# Altium PCB classyTKL_ALPS.PcbDoc (part 2 of 2)
Units mm, origin at the board's own origin, x right, y up, seen from the top; angles counter-clockwise.
Board outline 346.59 x 122.85 mm, 2 copper layers (Component Side, Bottom Layer), stack 1.571 mm thick; 201 components, 128 nets, 679 pads, 47 vias.
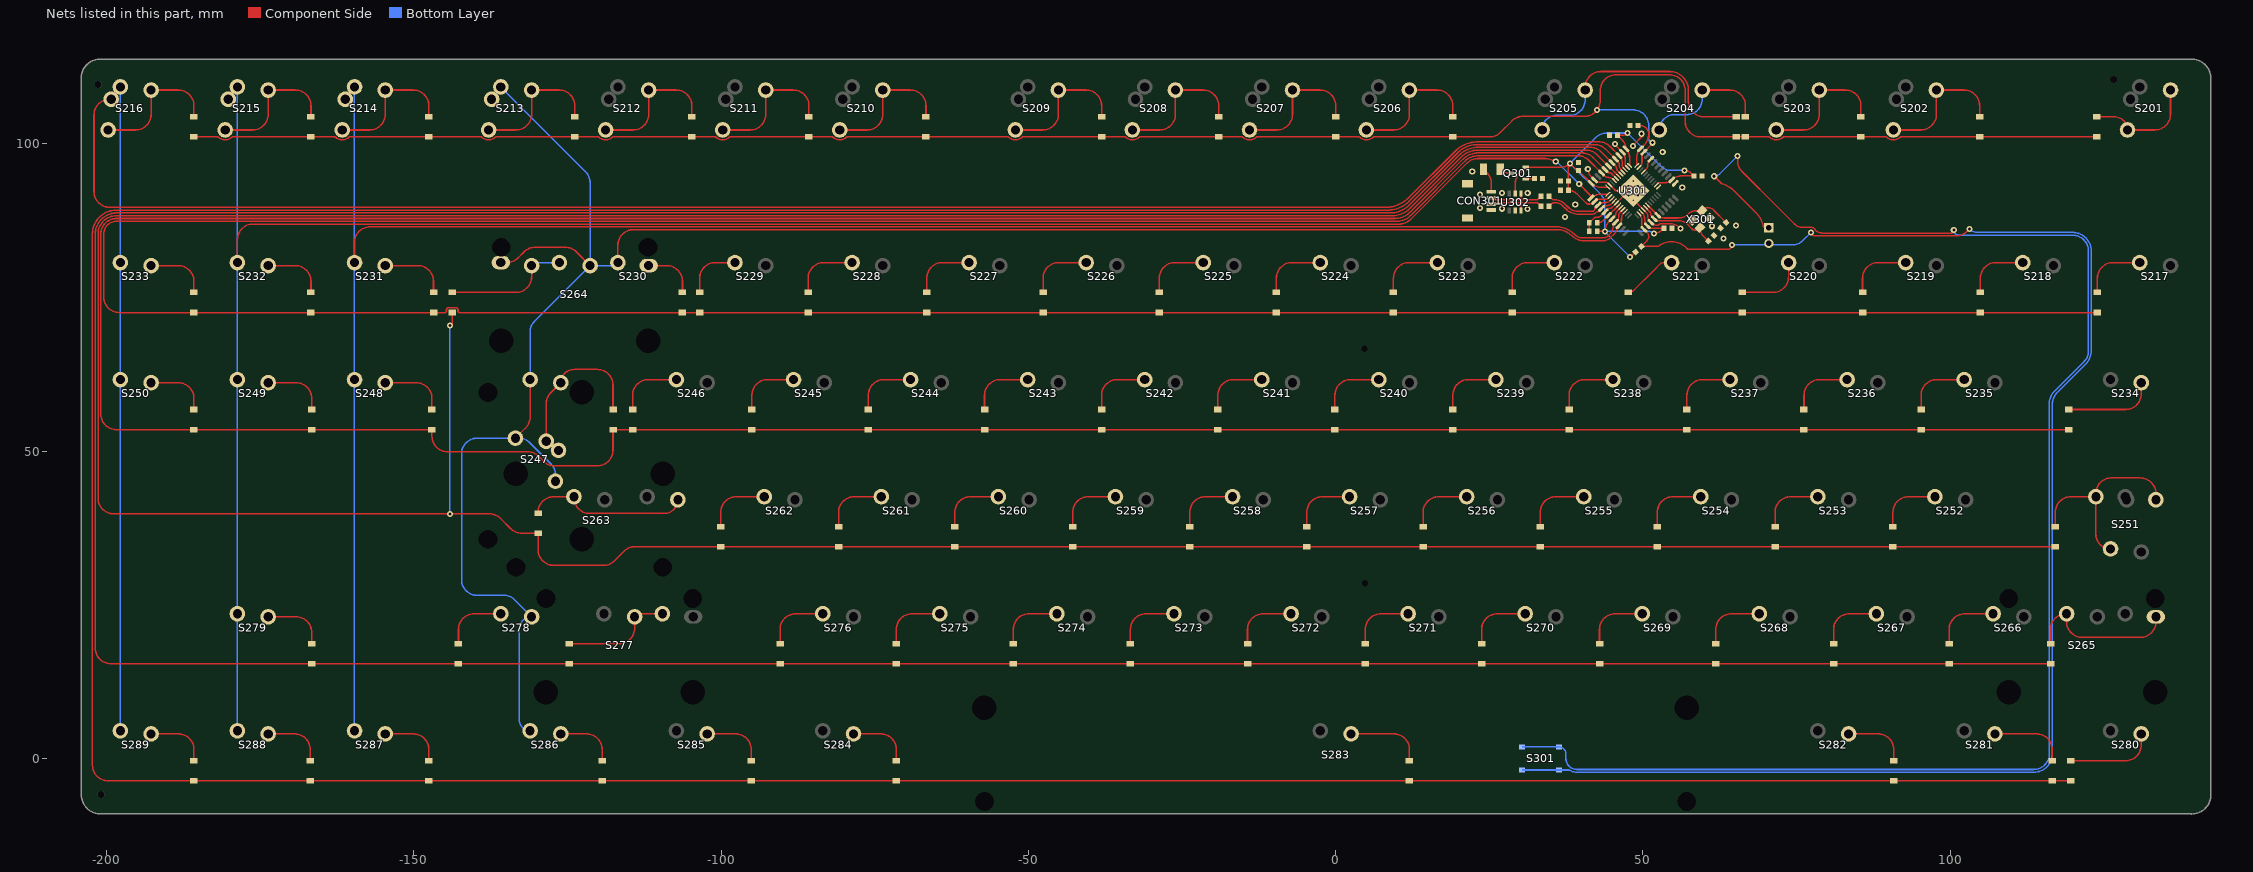
[diagram p2: the nets of this part, all layers, seen from the top]

## Via types
v1: diameter 1, hole 0.5, Component Side to Bottom Layer, tented both sides, 38 vias
v2: diameter 0.6, hole 0.3, Component Side to Bottom Layer, tented bottom, 9 vias

## Nets (pads, with @x,y where several pads share a name; then routed paths per layer and width w, separated by ;. In a path a pad name is that pad's centre, name@x,y a point inside that pad or via, vN(x,y) a via of type N, cw(c..) or ccw(c..) an arc to the next point about the centre after c; other vN are vias at no path point) (continued)
col14: S213.2 S230.2 S247.2 S264.2 S278.2 S286.2 U301.9 | length 338.6
  Component Side w0.254: S264.2@-135.851,80.7 -134.855,80.7 ccw(c-134.855,83.24) -133.059,81.444 -132.062,82.441 cw(c-130.266,80.645) -130.266,83.185 -125.363,83.185 cw(c-125.363,80.645) -123.567,82.441 S264.2@-121.326,80.2 ; S247.2@-133.469,52.125 -131.832,53.762 ccw(c-133.628,55.558) -131.088,55.558 S247.2@-131.088,61.65 ; S230.2@-116.801,80.7 -116.801,83.515 cw(c-114.261,83.515) -116.8,83.535 cw(c-114.261,83.515) -114.281,86.055 cw(c-114.261,83.515) -114.261,86.055 35.995,86.055 cw(c35.995,82.604) 38.435,85.044 ccw(c40.34,86.949) 40.34,84.255 43.54,84.255 ccw(c43.54,85.917) 44.546,84.594 45.393,85.441 ccw(c44.474,86.36) 45.773,86.36 U301.9@46.095,86.682 46.127,86.714 ccw(c45.211,87.63) 46.506,87.63 46.506,87.884 cw(c47.67,87.884) 46.847,88.707 U301.9@47.12,88.98
  Bottom Layer w0.254: S264.2@-135.891,81.28 S264.2@-134.803,80.193 ; S213.2@-135.891,109.275 S213.2@-135.891,109.855 ; S213.2@-135.851,109.275 -122.069,95.494 cw(c-123.866,93.698) -121.326,93.698 S264.2@-121.326,80.2 ; S286.2@-131.088,4.5 cw(c-131.088,6.255) -132.842,6.255 -132.842,21.058 cw(c-130.851,21.058) S278.2@-130.851,23.05 -133.699,25.898 ccw(c-135.255,24.342) -135.255,26.543 -139.7,26.543 cw(c-139.7,29.083) -142.24,29.083 -142.24,49.585 cw(c-139.7,49.585) -139.7,52.125 S247.2@-133.469,52.125 -132.933,52.125 cw(c-132.933,49.585) -131.137,51.381 -127.713,47.957 cw(c-129.509,46.161) -126.969,46.161 S247.2@-126.969,45.125 ; S247.2@-131.088,61.65 -131.088,69.385 cw(c-128.548,69.385) -130.344,71.181 S264.2@-121.326,80.2 ; S230.2@-116.801,80.7 cw(c-118.008,81.907) -118.008,80.2 S264.2@-121.326,80.2
col15: S214.2 S231.2 S248.2 S287.2 U301.8 | length 319.2
  Component Side w0.254: S231.2@-159.663,80.7 -159.663,83.969 cw(c-157.123,83.969) -157.123,86.509 35.995,86.509 cw(c35.995,82.604) 38.756,85.365 ccw(c40.34,86.949) 40.34,84.709 43.48,84.709 ccw(c43.48,86.01) 44.399,85.09 44.485,85.176 ccw(c42.731,86.93) 45.212,86.93 U301.8@45.529,87.247 45.703,87.421 ccw(c44.859,88.265) 46.052,88.265 cw(c46.908,88.265) 46.302,88.869 U301.8@46.767,89.333
  Bottom Layer w0.254: S287.2@-159.703,5.08 -159.703,61.65 -159.703,80.7 -159.703,109.275 S214.2@-159.703,109.854
col16: S215.2 S232.2 S249.2 S279.2 S288.2 U301.1 | length 339.9
  Component Side w0.254: S232.2@-178.713,80.7 -178.713,84.423 cw(c-176.173,84.423) -176.173,86.963 10.388,86.963 ccw(c10.388,89.503) 12.184,87.707 21.368,96.89 cw(c23.164,95.094) 23.164,97.634 34.09,97.634 cw(c34.09,95.094) v1@35.886,96.89 ; v1(39.624,93.472) 41.343,91.753 cw(c40.798,91.207) U301.1@41.569,91.207 cw(c43.02,89.756) 43.02,91.808 U301.1@44.292,91.808
  Bottom Layer w0.254: S215.2@-178.994,109.855 S215.2@-178.753,109.855 ; S288.2@-178.753,5.08 S232.2@-178.753,80.7 ; S232.2@-178.713,80.7 S215.2@-178.713,109.275 ; v1(35.814,97.155) cw(c35.814,96.848) 36.031,97.065 v1(39.624,93.472)
col17: S216.2 S233.2 S250.2 S289.2 U301.36 | length 378.5
  Component Side w0.254: S216.2@-199.263,107.275 -199.512,107.275 ccw(c-199.512,104.735) -202.052,104.735 -202.052,92.227 ccw(c-199.512,92.227) -199.512,89.687 8.132,89.687 ccw(c8.132,94.951) 11.854,91.229 19.441,98.816 cw(c23.164,95.094) 23.164,100.358 42.786,100.358 cw(c42.786,97.818) 44.582,99.614 U301.36@46.095,98.101 U301.36@46.223,97.973 ; U301.36@46.223,97.973 cw(c45.278,97.028) 46.614,97.028 46.614,96.774 ccw(c47.737,96.774) 46.943,95.98 U301.36@47.12,95.803
  Bottom Layer w0.254: S289.2@-197.803,5.08 -197.803,61.65 -197.803,80.7 -197.803,109.275 S216.2@-197.803,109.855
D_N: CON301.2 R305.2 U302.4 | length 9.3
  Component Side w0.254: CON301.2@25.344,91.24 ccw(c26.167,92.063) 26.167,90.899 30.226,90.899 ; U302.4@30.16,91.751 30.16,90.965 ccw(c30.226,90.965) 30.226,90.899 ; R305.2@33.392,91.496 32.905,91.009 cw(c32.639,91.275) 32.639,90.899 30.226,90.899
D_P: CON301.3 R306.2 U302.3 | length 9.5
  Component Side w0.254: CON301.3@25.344,90.24 cw(c25.831,89.753) 25.831,90.442 32.639,90.442 cw(c32.639,90.066) 32.905,90.332 R306.2@33.392,89.845 ; U302.3@30.16,89.351 30.16,90.367 cw(c30.226,90.367) 30.226,90.433
D_PRE_N: R305.1 U301.3 | length 12.1
  Component Side w0.254: R305.1@34.692,91.496 35.007,91.181 ccw(c35.687,91.861) 35.687,90.899 cw(c35.687,88.645) 37.281,90.239 37.749,89.771 ccw(c39.545,91.567) 39.545,89.027 41.704,89.027 ccw(c41.704,89.487) 42.029,89.162 42.134,89.266 cw(c42.719,89.266) 42.305,89.68 U301.3@42.701,90.076 cw(c43.542,89.235) 43.542,90.424 43.685,90.424 ccw(c43.685,91.96) 44.772,90.874 U301.3@44.999,91.101 ; 35.809,90.906 ccw(c35.953,92.503) 35.953,90.899
D_PRE_P: R306.1 U301.4 | length 12.2
  Component Side w0.254: R306.1@34.692,89.845 35.007,90.16 cw(c35.687,89.48) 35.687,90.442 cw(c35.687,88.645) 36.957,89.916 37.425,89.448 ccw(c39.545,91.567) 39.545,88.57 41.704,88.57 ccw(c41.704,89.487) 42.353,88.839 42.457,88.943 ccw(c42.457,89.528) 42.871,89.114 U301.4@43.266,89.51 43.479,89.722 cw(c44.069,89.132) 44.069,89.967 ccw(c44.069,91.18) 44.927,90.322 U301.4@45.352,90.747
GND: C301.1 C302.1 C303.1 C304.1 C305.1 C306.1 C307.1 C308.1 C309.1 C310.1 CON301.4 CON301.5 CON302.1 R302.2 R307.2 S301.1 U301.5 U301.15 U301.23 U301.35 U301.43 U302.2 X301.2 X301.4 | length 294.7
  Component Side w0.254: v1(41.026,95.941) ccw(c42.694,95.941) 41.514,94.762 U301.43@42.135,94.142 ccw(c43.003,95.01) 43.003,93.782 43.815,93.782 cw(c43.815,92.872) 44.458,93.516 U301.43@44.645,93.328 45.582,92.392 v2(46.855,92.392) U301.43@47.704,92.392 ; C302.1@41.265,85.781 C301.1@41.265,87.178 41.968,87.881 cw(c42.418,87.431) 42.418,88.067 ccw(c42.418,89.363) 43.334,88.447 U301.5@43.832,88.944 44.314,89.426 cw(c44.577,89.163) 44.577,89.535 ccw(c44.577,90.187) 45.038,89.726 U301.5@45.706,90.394 U301.43@47.704,92.392 ; v1(45.471,100.005) 45.471,99.856 U301.35@46.661,98.667 cw(c45.618,97.624) 47.092,97.624 47.092,96.774 ccw(c47.662,96.774) 47.259,96.371 U301.35@47.474,96.157 ; v1(48.387,99.695) 48.387,99.746 v1@50.043,101.402 ; U301.15@51.091,87.449 cw(c51.781,88.138) 50.805,88.138 ccw(c49.733,88.138) 50.491,88.897 U301.15@50.055,89.333 48.411,90.977 v2(48.411,92.392) U301.43@47.704,92.392 ; U301.15@51.091,87.448 U301.15@51.292,87.247 51.476,87.063 ccw(c52.249,87.836) 51.63,86.935 ccw(c52.249,87.836) 52.249,86.743 ccw(c52.198,87.405) 52.667,86.935 cw(c52.922,86.681) 52.922,87.041 54.274,87.041 cw(c54.274,84.501) 56.07,86.297 v1(56.134,86.233) ; C303.1@54.745,86.289 C303.1@54.745,86.415 ; v1@56.312,92.975 v1(56.393,92.893) ; v1(61.595,94.742) 62.744,93.593 ccw(c62.924,93.773) 62.851,93.529 cw(c61.482,88.918) 64.885,92.318 68.404,88.799 cw(c65.378,85.771) 69.562,86.676 ccw(c69.81,86.729) 69.724,86.49 ccw(c70.485,88.646) CON302.1@70.485,86.36 ; v1(65.405,98.044) 65.405,97.281 ccw(c67.945,97.281) 66.148,95.486 ccw(c67.945,97.281) 66.149,95.485 71.99,89.643 74.657,86.976 ccw(c76.008,88.327) 74.659,86.975 ccw(c76.008,88.327) 76.008,86.417 77.226,86.417 cw(c77.343,85.598) 78.083,85.968 ccw(c79.205,87.09) 78.97,85.521 ccw(c79.205,87.09) 79.205,85.503 97.536,85.503 100.297,85.503 ccw(c100.297,85.757) 100.54,85.682 ccw(c99.568,85.979) v1(100.584,85.979)
  Bottom Layer w0.254: S301.1@30.338,1.875 S301.1@36.337,1.875 cw(c36.337,0.747) 37.465,0.747 37.465,0 ccw(c39.261,0) 39.261,-1.796 113.597,-1.796 ccw(c113.597,0.744) 116.137,0.744 116.137,57.866 cw(c118.677,57.866) 116.881,59.662 121.744,64.524 ccw(c119.947,66.32) 122.487,66.32 122.487,82.606 ccw(c119.947,82.606) 122.192,83.795 ccw(c119.947,82.606) 121.136,84.851 ccw(c119.947,82.606) 119.947,85.146 101.417,85.146 cw(c101.417,85.979) v1(100.584,85.979) ; v1(61.595,94.742) ccw(c61.595,95.968) 62.462,95.101 v1(65.405,98.044)
  other v1: 63.124,84.638 61.214,86.614 65.151,86.741 37.338,88.138 31.242,89.408 27.056,89.464 23.5,89.591 38.989,90.17 23.5,91.75 27.056,92.004 31.247,92.004 22.225,95.504 53.213,98.679 49.789,101.656
  other v2: 48.411,90.836 47.633,91.614 49.188,91.614 49.966,92.392 47.633,93.169 49.188,93.169 48.411,93.947
NetC301_2: C301.2 U301.6 | length 4.6
  Component Side w0.254: C301.2@42.565,87.178 ccw(c42.565,88.703) 43.643,87.624 ; 43.644,87.625 U301.6@44.398,88.379 44.398,88.39 46.048,90.04 U301.6@46.06,90.04
NetC307_2: C307.2 U301.17 X301.3 | length 15
  Component Side w0.254: U301.17@50.762,90.04 U301.17@52.423,88.379 ccw(c53.461,89.416) 53.461,87.949 55.721,87.949 ccw(c55.721,90.329) 57.404,88.646 cw(c58.587,87.463) 58.587,89.136 X301.3@59.613,89.136 59.918,89.441 cw(c60.452,88.906) 60.452,89.662 cw(c60.452,88.141) 61.527,89.217 C307.2@63.536,87.208
NetC308_2: C308.2 U301.16 X301.1 | length 13.4
  Component Side w0.254: U301.16@50.408,89.687 51.109,88.986 cw(c50.747,88.623) 51.259,88.623 ccw(c51.772,88.623) 51.409,88.262 U301.16@51.858,87.813 ; U301.16@51.858,87.813 ccw(c52.626,88.581) 52.626,87.495 55.943,87.495 cw(c55.943,85.788) 57.15,86.995 57.986,86.159 ccw(c58.42,86.592) 58.42,85.979 ccw(c58.42,87.041) 59.171,86.29 X301.1@59.259,86.378 ccw(c61.254,86.378) 59.843,84.968 C308.2@60.633,84.178 C308.2@60.633,84.316
NetD201_1: D201.1 S201.1 | length 18.5
  Component Side w0.254: D201.1@123.83,104.41 126.714,104.41 cw(c126.714,102.275) S201.1@128.849,102.275 ; S201.1@129.032,102.275 133.309,102.275 ccw(c133.309,104.815) 135.849,104.815 S201.1@135.849,108.775
NetD202_1: D202.1 S202.1 | length 22.7
  Component Side w0.254: S202.1@90.749,102.275 95.209,102.275 ccw(c95.209,104.815) 97.749,104.815 S202.1@97.749,108.775 102.24,108.775 cw(c102.24,106.235) 104.78,106.235 D202.1@104.78,104.41
NetD203_1: D203.1 S203.1 | length 22.5
  Component Side w0.254: S203.1@71.699,102.275 76.159,102.275 ccw(c76.159,104.815) 78.699,104.815 S203.1@78.699,108.775 82.936,108.775 cw(c82.936,106.235) 85.476,106.235 D203.1@85.476,104.41
NetD204_1: D204.1 S204.1 | length 21.6
  Component Side w0.254: S204.1@59.649,108.775 64.14,108.775 cw(c64.14,106.235) 66.68,106.235 D204.1@66.68,104.41
  Bottom Layer w0.254: S204.1@52.649,102.275 cw(c55.149,102.275) 55.149,104.775 57.109,104.775 ccw(c57.109,107.315) 59.649,107.315 S204.1@59.649,108.775
NetD205_1: D205.1 S205.1 | length 42.8
  Component Side w0.254: S205.1@40.599,108.775 40.599,109.248 cw(c43.139,109.248) 43.139,111.788 54.328,111.788 cw(c54.328,108.712) 57.404,108.712 57.404,106.95 ccw(c59.944,106.95) 59.944,104.41 D205.1@65.151,104.41
  Bottom Layer w0.254: S205.1@33.599,102.275 33.599,102.306 cw(c35.941,102.306) 35.941,104.648 38.059,104.648 ccw(c38.059,107.188) 40.599,107.188 S205.1@40.599,108.775
NetD206_1: D206.1 S206.1 | length 22.7
  Component Side w0.254: S206.1@4.994,102.275 9.454,102.275 ccw(c9.454,104.815) 11.994,104.815 S206.1@11.994,108.775 16.515,108.775 cw(c16.515,106.235) 19.055,106.235 D206.1@19.055,104.41
NetD207_1: D207.1 S207.1 | length 22.7
  Component Side w0.254: S207.1@-14.026,102.275 -9.566,102.275 ccw(c-9.566,104.815) -7.026,104.815 S207.1@-7.026,108.775 -2.535,108.775 cw(c-2.535,106.235) 0.005,106.235 D207.1@0.005,104.41
NetD208_1: D208.1 S208.1 | length 22.7
  Component Side w0.254: S208.1@-33.076,102.275 -28.616,102.275 ccw(c-28.616,104.815) -26.076,104.815 S208.1@-26.076,108.775 -21.585,108.775 cw(c-21.585,106.235) -19.045,106.235 D208.1@-19.045,104.41
NetD209_1: D209.1 S209.1 | length 22.7
  Component Side w0.254: S209.1@-52.126,102.275 -47.666,102.275 ccw(c-47.666,104.815) -45.126,104.815 S209.1@-45.126,108.775 -40.635,108.775 cw(c-40.635,106.235) -38.095,106.235 D209.1@-38.095,104.41
NetD210_1: D210.1 S210.1 | length 22.7
  Component Side w0.254: S210.1@-80.701,102.275 -76.241,102.275 ccw(c-76.241,104.815) -73.701,104.815 S210.1@-73.701,108.775 -69.21,108.775 cw(c-69.21,106.235) -66.67,106.235 D210.1@-66.67,104.41
NetD211_1: D211.1 S211.1 | length 22.7
  Component Side w0.254: S211.1@-99.751,102.275 -95.291,102.275 ccw(c-95.291,104.815) -92.751,104.815 S211.1@-92.751,108.775 -88.26,108.775 cw(c-88.26,106.235) -85.72,106.235 D211.1@-85.72,104.41
NetD212_1: D212.1 S212.1 | length 22.7
  Component Side w0.254: S212.1@-118.801,102.275 -114.341,102.275 ccw(c-114.341,104.815) -111.801,104.815 S212.1@-111.801,108.775 -107.31,108.775 cw(c-107.31,106.235) -104.77,106.235 D212.1@-104.77,104.41
NetD213_1: D213.1 S213.1 | length 22.7
  Component Side w0.254: S213.1@-137.851,102.275 -133.391,102.275 ccw(c-133.391,104.815) -130.851,104.815 S213.1@-130.851,108.775 -126.36,108.775 cw(c-126.36,106.235) -123.82,106.235 D213.1@-123.82,104.41
NetD214_1: D214.1 S214.1 | length 22.8
  Component Side w0.254: S214.1@-161.663,102.275 -157.202,102.275 ccw(c-157.202,104.815) -154.662,104.815 S214.1@-154.662,108.775 -150.109,108.775 cw(c-150.109,106.235) -147.569,106.235 D214.1@-147.569,104.41
NetD215_1: D215.1 S215.1 | length 22.7
  Component Side w0.254: S215.1@-180.713,102.275 -176.253,102.275 ccw(c-176.253,104.815) -173.713,104.815 S215.1@-173.713,108.775 -169.286,108.775 cw(c-169.286,106.235) -166.746,106.235 D215.1@-166.746,104.41
NetD216_1: D216.1 S216.1 | length 22.7
  Component Side w0.254: S216.1@-199.763,102.275 -195.303,102.275 ccw(c-195.303,104.815) -192.763,104.815 S216.1@-192.763,108.775 -188.336,108.775 cw(c-188.336,106.235) -185.796,106.235 D216.1@-185.796,104.41
NetD217_1: D217.1 S217.1 | length 10.7
  Component Side w0.254: D217.1@123.957,75.835 123.957,78.16 cw(c126.497,78.16) 126.497,80.7 S217.1@130.849,80.7
NetD218_1: D218.1 S218.1 | length 10.7
  Component Side w0.254: D218.1@104.907,75.835 104.907,78.16 cw(c107.447,78.16) 107.447,80.7 S218.1@111.799,80.7
NetD219_1: D219.1 S219.1 | length 10.8
  Component Side w0.254: D219.1@85.73,75.835 85.73,78.16 cw(c88.27,78.16) 88.27,80.7 S219.1@92.749,80.7
NetD220_1: D220.1 S220.1 | length 11.3
  Component Side w0.254: D220.1@66.172,75.835 71.159,75.835 ccw(c71.159,78.375) 73.699,78.375 S220.1@73.699,80.7
NetD221_1: D221.1 S221.1 | length 9.5
  Component Side w0.254: D221.1@47.63,75.835 ccw(c47.63,77.146) 48.558,76.219 51.765,79.426 52.876,80.537 cw(c53.055,80.358) 52.986,80.602 cw(c53.685,78.16) 53.685,80.7 S221.1@54.649,80.7 ; S221.1@54.111,81.239 54.152,81.28 S221.1@54.609,81.28
NetD222_1: D222.1 S222.1 | length 10.7
  Component Side w0.254: D222.1@28.707,75.835 28.707,78.16 cw(c31.247,78.16) 31.247,80.7 S222.1@35.599,80.7
NetD223_1: D223.1 S223.1 | length 10.9
  Component Side w0.254: D223.1@9.403,75.835 9.403,78.16 cw(c11.943,78.16) 11.943,80.7 S223.1@16.549,80.7
NetD224_1: D224.1 S224.1 | length 10.9
  Component Side w0.254: D224.1@-9.647,75.835 -9.647,78.16 cw(c-7.107,78.16) -7.107,80.7 S224.1@-2.501,80.7
NetD225_1: D225.1 S225.1 | length 10.9
  Component Side w0.254: D225.1@-28.697,75.835 -28.697,78.16 cw(c-26.157,78.16) -26.157,80.7 S225.1@-21.551,80.7
NetD226_1: D226.1 S226.1 | length 10.8
  Component Side w0.254: D226.1@-47.62,75.835 -47.62,78.16 cw(c-45.08,78.16) -45.08,80.7 S226.1@-40.601,80.7
NetD227_1: D227.1 S227.1 | length 10.7
  Component Side w0.254: D227.1@-66.543,75.835 -66.543,78.16 cw(c-64.003,78.16) -64.003,80.7 S227.1@-59.651,80.7
NetD228_1: D228.1 S228.1 | length 10.9
  Component Side w0.254: D228.1@-85.847,75.835 -85.847,78.16 cw(c-83.307,78.16) -83.307,80.7 S228.1@-78.701,80.7
NetD229_1: D229.1 S229.1 | length 9.5
  Component Side w0.254: D229.1@-103.5,75.835 -103.5,78.16 cw(c-100.96,78.16) -100.96,80.7 S229.1@-97.751,80.7
NetD230_1: D230.1 S230.1 | length 8.8
  Component Side w0.254: S230.1@-111.801,80.2 -108.834,80.2 cw(c-108.834,77.66) -106.294,77.66 D230.1@-106.294,75.835
NetD231_1: D231.1 S231.1 | length 11.1
  Component Side w0.254: S231.1@-154.662,80.2 -149.347,80.2 cw(c-149.347,77.66) -146.807,77.66 D231.1@-146.807,75.835
NetD232_1: D232.1 S232.1 | length 10.2
  Component Side w0.254: S232.1@-173.713,80.2 -169.286,80.2 cw(c-169.286,77.66) -166.746,77.66 D232.1@-166.746,75.835
NetD233_1: D233.1 S233.1 | length 10.2
  Component Side w0.254: S233.1@-192.763,80.2 -188.336,80.2 cw(c-188.336,77.66) -185.796,77.66 D233.1@-185.796,75.835
NetD234_1: D234.1 S234.1 | length 14.9
  Component Side w0.254: D234.1@119.258,56.785 128.547,56.785 ccw(c128.547,59.325) 131.087,59.325 S234.1@131.087,60.96
NetD235_1: D235.1 S235.1 | length 10.8
  Component Side w0.254: D235.1@95.255,56.785 95.255,59.11 cw(c97.795,59.11) 97.795,61.65 S235.1@102.274,61.65
NetD236_1: D236.1 S236.1 | length 10.8
  Component Side w0.254: D236.1@76.205,56.785 76.205,59.11 cw(c78.745,59.11) 78.745,61.65 S236.1@83.224,61.65
NetD237_1: D237.1 S237.1 | length 10.8
  Component Side w0.254: D237.1@57.155,56.785 57.155,59.11 cw(c59.695,59.11) 59.695,61.65 S237.1@64.174,61.65
NetD238_1: D238.1 S238.1 | length 10.9
  Component Side w0.254: D238.1@37.978,56.785 37.978,59.11 cw(c40.518,59.11) 40.518,61.65 S238.1@45.124,61.65
NetD239_1: D239.1 S239.1 | length 10.8
  Component Side w0.254: D239.1@19.055,56.785 19.055,59.11 cw(c21.595,59.11) 21.595,61.65 S239.1@26.074,61.65
NetD240_1: D240.1 S240.1 | length 10.9
  Component Side w0.254: D240.1@-0.122,56.785 -0.122,59.11 cw(c2.418,59.11) 2.418,61.65 S240.1@7.024,61.65
NetD241_1: D241.1 S241.1 | length 10.9
  Component Side w0.254: D241.1@-19.172,56.785 -19.172,59.11 cw(c-16.632,59.11) -16.632,61.65 S241.1@-12.026,61.65
NetD242_1: D242.1 S242.1 | length 10.8
  Component Side w0.254: D242.1@-38.095,56.785 -38.095,59.11 cw(c-35.555,59.11) -35.555,61.65 S242.1@-31.076,61.65
NetD243_1: D243.1 S243.1 | length 10.8
  Component Side w0.254: D243.1@-57.145,56.785 -57.145,59.11 cw(c-54.605,59.11) -54.605,61.65 S243.1@-50.126,61.65
NetD244_1: D244.1 S244.1 | length 10.7
  Component Side w0.254: D244.1@-76.068,56.785 -76.068,59.11 cw(c-73.528,59.11) -73.528,61.65 S244.1@-69.176,61.65
NetD245_1: D245.1 S245.1 | length 10.5
  Component Side w0.254: D245.1@-94.991,56.785 -94.991,59.11 cw(c-92.451,59.11) -92.451,61.65 S245.1@-88.226,61.65
NetD246_1: D246.1 S246.1 | length 10.9
  Component Side w0.254: D246.1@-114.422,56.785 -114.422,59.11 cw(c-111.882,59.11) -111.882,61.65 S246.1@-107.276,61.65
NetD247_1: D247.1 S247.1 | length 25.5
  Component Side w0.254: S247.1@-128.469,51.625 -128.469,57.717 cw(c-125.929,57.717) -127.725,59.513 S247.1@-126.088,61.15 cw(c-123.936,61.15) -123.936,63.302 -120.137,63.302 cw(c-120.137,60.762) -117.597,60.762 D247.1@-117.597,56.785
NetD248_1: D248.1 S248.1 | length 10.9
  Component Side w0.254: S248.1@-154.662,61.15 -149.601,61.15 cw(c-149.601,58.61) -147.061,58.61 D248.1@-147.061,56.785
NetD249_1: D249.1 S249.1 | length 10.4
  Component Side w0.254: S249.1@-173.713,61.15 -169.159,61.15 cw(c-169.159,58.61) -166.619,58.61 D249.1@-166.619,56.785
NetD250_1: D250.1 S250.1 | length 10.2
  Component Side w0.254: S250.1@-192.763,61.15 -188.336,61.15 cw(c-188.336,58.61) -185.796,58.61 D250.1@-185.796,56.785
NetD251_1: D251.1 S251.1 | length 34.4
  Component Side w0.254: D251.1@117.099,37.735 117.099,40.06 cw(c119.639,40.06) 119.639,42.6 S251.1@123.706,42.6 ; S251.1@126.087,34.1 cw(c126.087,36.481) 123.706,36.481 S251.1@123.706,42.6 ; S251.1@133.468,42.1 133.468,43.109 ccw(c130.928,43.109) 130.928,45.649 126.246,45.649 ccw(c126.246,43.109) 126.132,45.646 ccw(c126.246,43.109) 123.708,43.223 ccw(c126.246,43.109) 123.706,43.109 S251.1@123.706,42.6
NetD252_1: D252.1 S252.1 | length 10.6
  Component Side w0.254: D252.1@90.683,37.735 90.683,40.06 cw(c93.223,40.06) 93.223,42.6 S252.1@97.512,42.6
NetD253_1: D253.1 S253.1 | length 10.7
  Component Side w0.254: D253.1@71.506,37.735 71.506,40.06 cw(c74.046,40.06) 74.046,42.6 S253.1@78.462,42.6
NetD254_1: D254.1 S254.1 | length 10.9
  Component Side w0.254: D254.1@52.329,37.735 52.329,40.06 cw(c54.869,40.06) 54.869,42.6 S254.1@59.412,42.6
NetD255_1: D255.1 S255.1 | length 10.9
  Component Side w0.254: D255.1@33.279,37.735 33.279,40.06 cw(c35.819,40.06) 35.819,42.6 S255.1@40.362,42.6
NetD256_1: D256.1 S256.1 | length 11.7
  Component Side w0.254: D256.1@14.229,37.735 14.229,40.06 cw(c16.769,40.06) 16.769,42.6 S256.1@21.312,42.6
  Bottom Layer w0.254: S256.1@20.706,42.614 S256.1@21.272,43.18
NetD257_1: D257.1 S257.1 | length 10.7
  Component Side w0.254: D257.1@-4.694,37.735 -4.694,40.06 cw(c-2.154,40.06) -2.154,42.6 S257.1@2.262,42.6
NetD258_1: D258.1 S258.1 | length 10.7
  Component Side w0.254: D258.1@-23.744,37.735 -23.744,40.06 cw(c-21.204,40.06) -21.204,42.6 S258.1@-16.788,42.6
NetD259_1: D259.1 S259.1 | length 10.7
  Component Side w0.254: D259.1@-42.794,37.735 -42.794,40.06 cw(c-40.254,40.06) -40.254,42.6 S259.1@-35.838,42.6
NetD260_1: D260.1 S260.1 | length 10.9
  Component Side w0.254: D260.1@-61.971,37.735 -61.971,40.06 cw(c-59.431,40.06) -59.431,42.6 S260.1@-54.888,42.6
NetD261_1: D261.1 S261.1 | length 10.7
  Component Side w0.254: D261.1@-80.894,37.735 -80.894,40.06 cw(c-78.354,40.06) -78.354,42.6 S261.1@-73.938,42.6
NetD262_1: D262.1 S262.1 | length 10.9
  Component Side w0.254: D262.1@-100.071,37.735 -100.071,40.06 cw(c-97.531,40.06) -97.531,42.6 S262.1@-92.988,42.6
NetD263_1: D263.1 S263.1 | length 27.1
  Component Side w0.254: D263.1@-129.789,40.06 cw(c-127.249,40.06) -127.249,42.6 S263.1@-123.951,42.6 -123.951,42.418 ccw(c-121.411,42.418) -121.411,39.878 -109.267,39.878 ccw(c-109.267,42.1) S263.1@-107.045,42.1
NetD264_1: D264.1 S264.1 | length 21.5
  Component Side w0.254: D264.1@-143.759,75.835 -133.391,75.835 ccw(c-133.391,78.375) -130.851,78.375 S264.1@-130.851,80.2 ; S264.1@-127.001,81.28 S264.1@-126.366,81.28
  Bottom Layer w0.254: S264.1@-130.851,80.2 -130.35,80.7 S264.1@-126.326,80.7
NetD265_1: D265.1 S265.1 | length 25.9
  Component Side w0.254: D265.1@116.332,18.685 116.332,21.01 cw(c118.872,21.01) 118.872,23.55 S265.1@118.943,23.55 118.943,22.24 ccw(c121.483,22.24) 121.483,19.7 130.942,19.7 ccw(c130.942,22.226) 133.468,22.226 S265.1@133.468,23.05
NetD266_1: D266.1 S266.1 | length 10.9
  Component Side w0.254: D266.1@99.827,18.685 99.827,21.01 cw(c102.367,21.01) 102.367,23.55 S266.1@106.979,23.55
NetD267_1: D267.1 S267.1 | length 10.7
  Component Side w0.254: D267.1@81.031,18.685 81.031,21.01 cw(c83.571,21.01) 83.571,23.55 S267.1@87.987,23.55
NetD268_1: D268.1 S268.1 | length 10.9
  Component Side w0.254: D268.1@61.854,18.685 61.854,21.01 cw(c64.394,21.01) 64.394,23.55 S268.1@68.937,23.55
NetD269_1: D269.1 S269.1 | length 10.7
  Component Side w0.254: D269.1@42.931,18.685 42.931,21.01 cw(c45.471,21.01) 45.471,23.55 S269.1@49.887,23.55
NetD270_1: D270.1 S270.1 | length 10.9
  Component Side w0.254: D270.1@23.754,18.685 23.754,21.01 cw(c26.294,21.01) 26.294,23.55 S270.1@30.837,23.55
NetD271_1: D271.1 S271.1 | length 10.7
  Component Side w0.254: D271.1@4.831,18.685 4.831,21.01 cw(c7.371,21.01) 7.371,23.55 S271.1@11.787,23.55
NetD272_1: D272.1 S272.1 | length 10.9
  Component Side w0.254: D272.1@-14.346,18.685 -14.346,21.01 cw(c-11.806,21.01) -11.806,23.55 S272.1@-7.263,23.55
NetD273_1: D273.1 S273.1 | length 10.9
  Component Side w0.254: D273.1@-33.396,18.685 -33.396,21.01 cw(c-30.856,21.01) -30.856,23.55 S273.1@-26.313,23.55
NetD274_1: D274.1 S274.1 | length 10.9
  Component Side w0.254: D274.1@-52.446,18.685 -52.446,21.01 cw(c-49.906,21.01) -49.906,23.55 S274.1@-45.363,23.55
NetD275_1: D275.1 S275.1 | length 10.9
  Component Side w0.254: D275.1@-71.496,18.685 -71.496,21.01 cw(c-68.956,21.01) -68.956,23.55 S275.1@-64.413,23.55
NetD276_1: D276.1 S276.1 | length 10.7
  Component Side w0.254: D276.1@-90.419,18.685 -90.419,21.01 cw(c-87.879,21.01) -87.879,23.55 S276.1@-83.463,23.55
NetD277_1: D277.1 S277.1 | length 18.6
  Component Side w0.254: D277.1@-124.709,18.685 -116.621,18.685 ccw(c-116.621,21.225) -114.081,21.225 S277.1@-114.081,23.05 -113.58,23.55 S277.1@-109.556,23.55
NetD278_1: D278.1 S278.1 | length 10.7
  Component Side w0.254: D278.1@-142.743,18.685 -142.743,21.01 cw(c-140.203,21.01) -140.203,23.55 S278.1@-135.851,23.55
NetD279_1: D279.1 S279.1 | length 10.4
  Component Side w0.254: S279.1@-173.713,23.05 -169.159,23.05 cw(c-169.159,20.51) -166.619,20.51 D279.1@-166.619,18.685
NetD280_1: D280.1 S280.1 | length 14.7
  Component Side w0.254: D280.1@119.639,-0.365 128.547,-0.365 ccw(c128.547,2.175) 131.087,2.175 S280.1@131.087,4
NetD281_1: D281.1 S281.1 | length 12.6
  Component Side w0.254: S281.1@107.275,4 114.051,4 cw(c114.051,1.46) 116.591,1.46 D281.1@116.591,-0.365
NetD282_1: D282.1 S282.1 | length 10.6
  Component Side w0.254: S282.1@83.463,4 88.27,4 cw(c88.27,1.46) 90.81,1.46 D282.1@90.81,-0.365
  Bottom Layer w0.254: S282.1@83.451,4 S282.1@83.463,4
NetD283_1: D283.1 S283.1 | length 12.8
  Component Side w0.254: S283.1@2.5,4 9.46,4 cw(c9.46,1.46) 12,1.46 D283.1@12,-0.365
NetD284_1: D284.1 S284.1 | length 10.2
  Component Side w0.254: S284.1@-78.462,4 -74.036,4 cw(c-74.036,1.46) -71.496,1.46 D284.1@-71.496,-0.365
NetD285_1: D285.1 S285.1 | length 10.4
  Component Side w0.254: S285.1@-102.275,4 -97.658,4 cw(c-97.658,1.46) -95.118,1.46 D285.1@-95.118,-0.365
NetD286_1: D286.1 S286.1 | length 10
  Component Side w0.254: S286.1@-126.087,4 -121.915,4 cw(c-121.915,1.46) -119.375,1.46 D286.1@-119.375,-0.365
NetD287_1: D287.1 S287.1 | length 10.4
  Component Side w0.254: S287.1@-154.663,4 -150.109,4 cw(c-150.109,1.46) -147.569,1.46 D287.1@-147.569,-0.365
NetD288_1: D288.1 S288.1 | length 10.1
  Component Side w0.254: S288.1@-173.713,4 -169.413,4 cw(c-169.413,1.46) -166.873,1.46 D288.1@-166.873,-0.365
NetD289_1: D289.1 S289.1 | length 10.2
  Component Side w0.254: S289.1@-192.763,4 -188.336,4 cw(c-188.336,1.46) -185.796,1.46 D289.1@-185.796,-0.365
NetF301_2: F301.2 Q301.3 | length 1.9
  Component Side w0.254: F301.2@26.75,95.885 ccw(c28.283,97.418) 28.283,95.25 Q301.3@28.518,95.25
NetQ301_1: Q301.1 R307.1 | length 1.5
  Component Side w0.254: Q301.1@30.918,94.3 cw(c31.065,94.153) 31.065,94.361 R307.1@32.37,94.361
NetR302_1: R302.1 U301.33 | length 8.3
  Component Side w0.254: U301.33@48.994,96.51 48.994,97.782 cw(c51.046,97.782) U301.33@49.595,99.233 50.189,99.826 ccw(c48.392,101.622) 50.932,101.622 ccw(c49.558,101.622) 50.224,102.825 ccw(c49.558,101.622) 49.558,102.997 R302.1@49.164,102.997
PC7: D201.2 D202.2 D203.2 D204.2 D205.2 D206.2 D207.2 D208.2 D209.2 D210.2 D211.2 D212.2 D213.2 D214.2 D215.2 D216.2 U301.32 | length 343.9
  Component Side w0.254: D216.2@-185.796,101.14 -181.938,101.14 cw(c-181.936,100.886) -181.769,101.077 ccw(c-180.713,102.275) -179.657,101.077 cw(c-179.49,100.886) -179.488,101.14 D215.2@-166.746,101.14 -162.885,101.14 cw(c-162.886,100.886) -162.718,101.077 ccw(c-161.663,102.275) -160.607,101.077 cw(c-160.439,100.886) -160.438,101.14 D214.2@-147.569,101.14 -139.073,101.14 cw(c-139.074,100.886) -138.906,101.077 ccw(c-137.851,102.275) -136.795,101.077 cw(c-136.627,100.886) -136.626,101.14 D213.2@-123.82,101.14 -120.023,101.14 cw(c-120.024,100.886) -119.856,101.077 ccw(c-118.801,102.275) -117.745,101.077 cw(c-117.577,100.886) -117.576,101.14 D212.2@-104.77,101.14 -100.973,101.14 cw(c-100.974,100.886) -100.806,101.077 ccw(c-99.751,102.275) -98.695,101.077 cw(c-98.527,100.886) -98.526,101.14 D211.2@-85.72,101.14 -81.923,101.14 cw(c-81.924,100.886) -81.756,101.077 ccw(c-80.701,102.275) -79.645,101.077 cw(c-79.477,100.886) -79.476,101.14 D210.2@-66.67,101.14 -53.348,101.14 cw(c-53.349,100.886) -53.181,101.077 ccw(c-52.126,102.275) -51.07,101.077 cw(c-50.902,100.886) -50.901,101.14 D209.2@-38.095,101.14 -34.298,101.14 cw(c-34.299,100.886) -34.131,101.077 ccw(c-33.076,102.275) -32.02,101.077 cw(c-31.852,100.886) -31.851,101.14 D208.2@-19.045,101.14 -15.248,101.14 cw(c-15.249,100.886) -15.081,101.077 ccw(c-14.026,102.275) -12.97,101.077 cw(c-12.802,100.886) -12.801,101.14 D207.2@0.005,101.14 3.77,101.14 cw(c3.771,100.886) 3.939,101.077 ccw(c4.994,102.275) 6.05,101.077 cw(c6.218,100.886) 6.219,101.14 D206.2@19.055,101.14 25.031,101.14 ccw(c25.031,103.68) 26.827,101.884 28.692,103.749 cw(c30.488,101.953) 30.488,104.493 40.485,104.493 ccw(c40.485,107.061) 43.053,107.061 43.053,108.712 cw(c45.593,108.712) 45.593,111.252 54.328,111.252 cw(c54.328,108.712) 56.868,108.712 56.868,103.68 ccw(c59.408,103.68) 59.408,101.14 D205.2@65.151,101.14 D204.2@66.68,101.14 70.475,101.14 cw(c70.476,100.886) 70.644,101.077 ccw(c71.699,102.275) 72.755,101.077 cw(c72.923,100.886) 72.924,101.14 D203.2@85.476,101.14 89.527,101.14 cw(c89.526,100.886) 89.694,101.077 ccw(c90.749,102.275) 91.805,101.077 cw(c91.973,100.886) 91.974,101.14 D202.2@104.78,101.14 D201.2@123.83,101.14 ; U301.32@49.348,96.157 U301.32@49.578,96.387 ; U301.32@49.579,96.388 ccw(c48.938,97.028) 49.843,97.028 49.843,97.986 cw(c50.721,97.986) 50.101,98.607 U301.32@50.161,98.667 51.467,99.973 ccw(c51.237,100.203) v1(51.562,100.203)
  Bottom Layer w0.254: v1(42.545,105.537) 48.387,105.537 cw(c48.387,102.997) 50.927,102.997 50.927,100.838 ccw(c51.562,100.838) v1(51.562,100.203)
PF0: D217.2 D218.2 D219.2 D220.2 D221.2 D222.2 D223.2 D224.2 D225.2 D226.2 D227.2 D228.2 D229.2 D230.2 D231.2 D232.2 D233.2 U301.41 | length 589.8
  Component Side w0.254: 21.046,97.211 cw(c23.164,95.094) 23.164,98.088 39.399,98.088 cw(c39.399,95.548) 41.195,97.344 U301.41@43.266,95.273 U301.41@43.674,94.865 ; 21.046,97.211 12.129,88.294 cw(c10.012,90.411) 10.012,87.417 -198.395,87.417 ccw(c-198.395,85.331) -200.481,85.331 -200.481,75.105 ccw(c-197.941,75.105) -197.941,72.565 D233.2@-185.796,72.565 D232.2@-166.746,72.565 D231.2@-146.807,72.565 -144.95,72.565 ccw(c-144.95,72.819) -144.696,72.819 -144.696,73.02 cw(c-144.369,73.02) -144.369,73.347 -143.148,73.347 cw(c-143.148,73.02) -142.821,73.02 -142.821,72.819 ccw(c-142.567,72.819) -142.567,72.565 D230.2@-106.294,72.565 D229.2@-103.5,72.565 D228.2@-85.847,72.565 D227.2@-66.543,72.565 D226.2@-47.62,72.565 D225.2@-28.697,72.565 D224.2@-9.647,72.565 D223.2@9.403,72.565 D222.2@28.707,72.565 D221.2@47.63,72.565 D220.2@66.172,72.565 D219.2@85.73,72.565 D218.2@104.907,72.565 D217.2@123.957,72.565 ; U301.41@43.674,94.865 ccw(c44.45,95.641) 44.45,94.544 cw(c44.45,93.593) 45.122,94.266 U301.41@45.352,94.036
PF1: D234.2 D235.2 D236.2 D237.2 D238.2 D239.2 D240.2 D241.2 D242.2 D243.2 D244.2 D245.2 D246.2 D247.2 D248.2 D249.2 D250.2 U301.40 | length 612.8
  Component Side w0.254: U301.40@45.706,94.389 44.939,95.156 ccw(c44.577,94.794) 44.577,95.306 cw(c44.577,95.818) 44.215,95.456 U301.40@43.832,95.839 41.873,97.798 ccw(c40.077,96.002) 40.077,98.542 23.164,98.542 ccw(c23.164,95.094) 20.725,97.532 12.074,88.881 cw(c9.636,91.319) 9.636,87.871 -198.404,87.871 ccw(c-198.404,85.331) -198.774,87.844 ccw(c-198.404,85.331) -200.916,85.702 ccw(c-198.404,85.331) -200.944,85.331 -200.944,56.055 ccw(c-198.404,56.055) -198.404,53.515 D250.2@-185.796,53.515 D249.2@-166.619,53.515 D248.2@-147.061,53.515 -147.061,52.451 ccw(c-144.521,52.451) -144.521,49.911 -131.481,49.911 cw(c-131.481,47.371) -129.685,49.167 -128.778,48.26 ccw(c-127.245,49.793) -127.245,47.625 -120.137,47.625 ccw(c-120.137,50.165) -117.597,50.165 D247.2@-117.597,53.515 D246.2@-114.422,53.515 D245.2@-94.991,53.515 D244.2@-76.068,53.515 D243.2@-57.145,53.515 D242.2@-38.095,53.515 D241.2@-19.172,53.515 D240.2@-0.122,53.515 D239.2@19.055,53.515 D238.2@37.978,53.515 D237.2@57.155,53.515 D236.2@76.205,53.515 D235.2@95.255,53.515 D234.2@119.258,53.515
PF4: D251.2 D252.2 D253.2 D254.2 D255.2 D256.2 D257.2 D258.2 D259.2 D260.2 D261.2 D262.2 D263.2 D264.2 U301.39 | length 660.8
  Component Side w0.254: v1(-144.145,70.485) ccw(c-144.145,70.871) -143.759,70.871 D264.2@-143.759,72.565 ; U301.39@44.398,96.404 U301.39@46.06,94.743 ; U301.39@44.455,96.322 42.525,98.252 ccw(c40.729,96.456) 40.729,98.996 23.164,98.996 ccw(c23.164,95.094) 20.404,97.853 12.019,89.468 cw(c9.26,92.227) 9.26,88.325 -198.404,88.325 ccw(c-198.404,85.331) -198.994,88.266 ccw(c-198.404,85.331) -201.339,85.921 ccw(c-198.404,85.331) -201.398,85.331 -201.398,42.347 ccw(c-198.858,42.347) -198.858,39.807 v1(-144.14,39.807) -137.699,39.807 cw(c-137.699,37.267) -135.903,39.063 -134.231,37.392 ccw(c-132.435,39.188) -132.435,36.648 D263.2@-129.789,36.648 -129.789,33.965 ; D251.2@117.099,34.465 D252.2@90.683,34.465 D253.2@71.506,34.465 D254.2@52.329,34.465 D255.2@33.279,34.465 D256.2@14.229,34.465 D257.2@-4.694,34.465 D258.2@-23.744,34.465 D259.2@-42.794,34.465 D260.2@-61.971,34.465 D261.2@-80.894,34.465 D262.2@-100.071,34.465 -114.012,34.465 ccw(c-114.012,31.925) -115.808,33.721 -117.361,32.169 cw(c-119.157,33.965) -119.157,31.425 -127.249,31.425 ; -129.789,33.965 ccw(c-127.249,33.965) -127.249,31.425 ; -129.789,33.965 ccw(c-127.249,33.965) -127.249,31.425
  Bottom Layer w0.254: v1(-144.14,39.807) v1@-144.14,70.124
PF5: D265.2 D266.2 D267.2 D268.2 D269.2 D270.2 D271.2 D272.2 D273.2 D274.2 D275.2 D276.2 D277.2 D278.2 D279.2 U301.38 | length 643.2
  Component Side w0.254: U301.38@44.963,96.957 43.214,98.706 ccw(c41.418,96.91) 41.418,99.45 23.164,99.45 ccw(c23.164,95.094) 20.083,98.174 11.964,90.055 cw(c8.884,93.135) 8.884,88.779 -198.404,88.779 ccw(c-198.404,85.331) -199.221,88.681 ccw(c-198.404,85.331) -201.753,86.149 ccw(c-198.404,85.331) -201.852,85.331 -201.852,17.955 ccw(c-199.312,17.955) -199.312,15.415 D279.2@-166.619,15.415 D278.2@-142.743,15.415 D277.2@-124.709,15.415 D276.2@-90.419,15.415 D275.2@-71.496,15.415 D274.2@-52.446,15.415 D273.2@-33.396,15.415 D272.2@-14.346,15.415 D271.2@4.831,15.415 D270.2@23.754,15.415 D269.2@42.931,15.415 D268.2@61.854,15.415 D267.2@81.031,15.415 D266.2@99.827,15.415 D265.2@116.332,15.415 ; U301.38@44.963,96.97 45.554,96.379 cw(c45.187,96.012) 45.706,96.012 ccw(c46.212,96.012) 45.854,95.655 U301.38@46.413,95.096
PF6: D280.2 D281.2 D282.2 D283.2 D284.2 D285.2 D286.2 D287.2 D288.2 D289.2 U301.37 | length 667.3
  Component Side w0.254: U301.37@46.488,95.728 cw(c47.281,96.52) 46.16,96.52 ccw(c45.232,96.52) 45.889,97.176 U301.37@45.529,97.536 43.905,99.16 ccw(c42.109,97.364) 42.109,99.904 23.164,99.904 ccw(c23.164,95.094) 19.762,98.495 11.909,90.642 cw(c8.508,94.043) 8.508,89.233 -198.404,89.233 ccw(c-198.404,85.331) -199.455,89.089 ccw(c-198.404,85.331) -202.161,86.383 ccw(c-198.404,85.331) -202.306,85.331 -202.306,-1.095 ccw(c-199.766,-1.095) -199.766,-3.635 D289.2@-185.796,-3.635 D288.2@-166.873,-3.635 D287.2@-147.569,-3.635 D286.2@-119.375,-3.635 D285.2@-95.118,-3.635 D284.2@-71.496,-3.635 9.276,-3.635 D282.2@90.81,-3.635 D281.2@116.591,-3.635 D280.2@119.639,-3.635 ; U301.37@46.489,95.728 U301.37@46.767,95.45
RAW: CON301.1 F301.1 | length 4.1
  Component Side w0.254: F301.1@24.05,95.885 24.6,95.335 cw(c22.804,93.539) 25.344,93.539 CON301.1@25.344,92.24
RST: CON302.2 R301.2 S301.2 U301.13 | length 255.9
  Component Side w0.254: U301.13@49.348,88.626 49.487,88.486 cw(c48.758,87.757) 49.789,87.757 49.789,87.012 ccw(c51.057,87.012) U301.13@50.161,86.116 50.663,85.614 cw(c50.012,84.963) 50.932,84.963 cw(c49.841,84.963) 50.613,84.192 ; 50.613,84.191 R301.2@49.741,83.32 52.372,83.32 ccw(c52.372,83.574) 52.529,83.375 cw(c54.649,80.7) 55.708,83.945 cw(c54.649,80.7) 57.219,82.947 ccw(c57.41,83.114) 57.41,82.86 58.674,82.86 62.357,82.86 63.81,82.86 ccw(c63.81,83.566) v1(64.516,83.566) ; v1(77.343,85.598) ccw(c77.892,85.598) 77.892,85.049 100.964,85.049 ccw(c100.964,87.589) 102.76,85.793 v1(103.129,86.162)
  Bottom Layer w0.254: S301.2@30.338,-1.875 S301.2@36.337,-1.875 37.942,-1.875 cw(c37.943,-2.129) 38.077,-1.913 ccw(c39.261,0) 39.261,-2.25 113.597,-2.25 ccw(c113.597,0.744) 116.591,0.744 116.591,57.49 cw(c119.585,57.49) 117.468,59.606 ; v1(64.516,83.566) 74.259,83.566 ccw(c74.259,86.106) 76.055,84.31 v1(77.343,85.598) ; v1(103.129,86.162) ccw(c104.486,87.519) 104.486,85.6 119.947,85.6 cw(c119.947,82.606) 121.411,85.218 cw(c119.947,82.606) 122.559,84.07 cw(c119.947,82.606) 122.941,82.606 122.941,66.32 cw(c119.947,66.32) 122.065,64.204 ; 117.468,59.607 122.065,64.203
scroll_led: U301.30 | length 2.5
  Component Side w0.254: U301.30@50.055,95.45 50.49,95.885 ; 50.491,95.886 ccw(c49.728,96.647) 50.805,96.647 cw(c51.776,96.647) 51.09,97.333 U301.30@51.292,97.536
VCC: C302.2 C303.2 C304.2 C305.2 C306.2 C309.2 C310.2 Q301.2 R301.1 U301.2 U301.7 U301.14 U301.24 U301.34 U301.44 U302.5 | length 112.7
  Component Side w0.254: U302.5@29.21,91.926 29.21,93.44 cw(c31.75,93.44) 29.954,95.236 Q301.2@30.918,96.2 36.585,96.2 ccw(c36.585,98.351) v1@38.104,96.829 ; U301.2@42.135,90.641 42.004,90.51 cw(c41.317,91.198) 41.317,90.226 41.148,90.226 cw(c41.148,90.79) 40.75,90.391 39.267,91.874 ccw(c37.861,90.468) C310.2@37.861,92.456 C304.2@37.861,93.98 37.861,96.24 cw(c38.696,96.24) v1@38.104,96.829 ; U301.2@42.136,90.642 cw(c42.972,89.805) 42.972,90.988 43.899,90.988 ccw(c43.899,91.664) U301.2@44.376,91.186 ; C302.2@42.565,85.781 v1(43.82,85.781) cw(c45.967,85.781) 44.448,87.298 ; U301.44@44.292,92.975 43.02,92.975 cw(c43.02,95.027) U301.44@41.569,93.576 41.569,93.605 C309.2@39.502,95.672 39.263,95.672 v1(38.105,96.83) cw(c36.585,98.351) v1@38.104,96.829 ; U301.2@44.377,91.186 U301.2@44.645,91.455 ; 44.449,87.299 U301.7@44.963,87.813 45.449,88.298 ccw(c45.086,88.66) 45.598,88.66 cw(c46.111,88.66) 45.748,89.022 U301.7@46.413,89.687 ; v1(47.503,101.783) cw(c46.584,102.703) 46.584,101.402 C306.2@45.867,101.402 46.653,100.616 cw(c45.27,99.233) U301.34@47.226,99.233 cw(c45.775,97.782) 47.827,97.782 U301.34@47.827,96.51 ; v1(47.884,81.59) 48.011,81.59 R301.1@48.822,82.4 ; U301.14@49.701,88.98 49.765,88.916 cw(c48.479,87.63) 50.297,87.63 ccw(c51.552,87.63) 50.665,86.743 U301.14@50.726,86.682 51.119,86.289 53.338,86.289 52.893,85.844 ; v1(51.821,85.4) ccw(c51.821,86.916) 52.893,85.843 ; U301.24@52.385,93.538 cw(c52.801,93.122) 52.801,93.71 53.644,93.71 ccw(c53.644,95.184) 54.685,94.141 cw(c56.271,92.557) 56.271,94.798 C305.2@58.284,94.798 57.833,95.249 ccw(c56.774,94.19) v1(56.774,95.687)
  Bottom Layer w0.254: v1@48.011,81.59 v1(47.884,81.59) 43.82,85.654 v1(43.82,85.781) ; v1(51.821,85.4) ccw(c50.902,84.48) 50.902,85.781 v1(43.82,85.781) ; v1(56.774,95.687) 54.652,95.687 cw(c54.652,98.227) 53.851,95.816 cw(c54.652,98.227) 52.856,96.431 v1(47.503,101.783) 44.111,101.783 ccw(c44.111,99.243) 42.315,101.039 v1(38.105,96.83) 43.077,91.859 cw(c41.28,90.063) 43.82,90.063 v1(43.82,85.781)
pads on no net: S201. S202. S203. S204. S205. S206. S207. S208. S209. S210. S211. S212. S213. S214. S215. S216. S217. S218. S219. S220. S221. S222. S223. S224. S225. S226. S227. S228. S229. S230. S231. S232. S233. S234. S235. S236. S237. S238. S239. S240. S241. S242. S243. S244. S245. S246. S247. S248. S249. S250. S251. S252. S253. S254. S255. S256. S257. S258. S259. S260. S261. S262. S263. S264. S265. S266. S267. S268. S269. S270. S271. S272. S273. S274. S275. S276. S277. S278. S279. S280. S281. S282. S283. S284. S285. S286. S287. S288. S289. U301.42 U302.1 U302.6
copper on no net: | length 23.4
  Component Side w0.279: 32.136,0.738 cw(c28.418,0.614) 32.135,0.752

## Polygon pours and split planes (outlines as drawn)
GND on Bottom Layer "Component Side-GND" (hatched 45Degree grid 0.508 track 0.203, remove dead copper, pour order 11): 21.087,86.035 22.738,86.035 ccw(c22.738,88.615) 24.563,86.79 24.988,87.215 cw(c26.124,86.079) 26.124,87.686 35.565,87.686 cw(c35.565,84.747) 37.643,86.825 ccw(c37.734,86.915) 37.644,86.824 37.643,86.825 39.022,85.446 ccw(c41.28,87.704) 41.28,84.511 56.012,84.511 cw(c56.012,81.572) 58.09,83.65 ccw(c58.181,83.74) 58.091,83.649 58.09,83.65 58.961,82.779 ccw(c61.219,85.037) 61.219,81.844 65.594,81.844 ccw(c65.594,83.675) 66.889,82.38 ccw(c64.63,84.638) 67.824,84.638 67.824,88.956 ccw(c64.63,88.956) 66.889,91.214 55.731,102.372 cw(c55.641,102.282) 55.731,102.372 ccw(c53.472,100.114) 53.472,103.307 45.344,103.307 ccw(c45.344,100.114) 43.086,102.372 ccw(c43.176,102.282) 43.086,102.372 39.167,98.453 cw(c39.258,98.363) 39.168,98.454 39.167,98.453 cw(c37.089,100.531) 37.089,97.592 21.087,97.592 ccw(c21.087,96.195) 19.69,96.195 19.69,87.432 ccw(c21.087,87.432)
GND on Component Side "Component Side-GND" (hatched 45Degree grid 0.508 track 0.203, remove dead copper, pour order 12): 21.087,86.035 22.738,86.035 ccw(c22.738,88.615) 24.563,86.79 24.988,87.215 cw(c26.124,86.079) 26.124,87.686 35.565,87.686 cw(c35.565,84.747) 37.643,86.825 ccw(c37.734,86.915) 37.644,86.824 37.643,86.825 39.022,85.446 ccw(c41.28,87.704) 41.28,84.511 56.012,84.511 cw(c56.012,81.572) 58.09,83.65 ccw(c58.181,83.74) 58.091,83.649 58.09,83.65 58.961,82.779 ccw(c61.219,85.037) 61.219,81.844 65.594,81.844 ccw(c65.594,83.675) 66.889,82.38 ccw(c64.63,84.638) 67.824,84.638 67.824,88.956 ccw(c64.63,88.956) 66.889,91.214 55.731,102.372 cw(c55.641,102.282) 55.731,102.372 ccw(c53.472,100.114) 53.472,103.307 45.344,103.307 ccw(c45.344,100.114) 43.086,102.372 ccw(c43.176,102.282) 43.086,102.372 39.167,98.453 cw(c39.258,98.363) 39.168,98.454 39.167,98.453 cw(c37.089,100.531) 37.089,97.592 21.087,97.592 ccw(c21.087,96.195) 19.69,96.195 19.69,87.432 ccw(c21.087,87.432)

## Other copper
Component Side:
  region: 1746 vertices and 2 holes, not listed, extent 25.4,-2.516 31.312,3.623
  region: 3595 vertices and 0 holes, not listed, extent -32.103,-3.251 -24.943,3.909
  text "Rev A3" at -4.318,-6.096 h3
  text "Rev A3" at -4.318,-6.096 h3
Bottom Layer:
  text "Reset" at 36.521,-5.575 h3

## Silkscreen, mask and mechanical layers (free items; w line width, h text height)
Top Overlay:
  text "RESET" at 68.707,88.392 h0.75
Top Solder:
  drawing of 3 lines, arcs and shapes, not listed
  text "Rev A3" at -4.318,-6.096 h3
  text "Rev A3" at -4.318,-6.096 h3
Solder Side:
  text "Reset" at 36.521,-5.575 h3
outline:
  lines w0.203: -52.991,85.4 -52.984,85.393
  lines w0.254: -204.032,-5.896 -204.032,110.685 cw(c-201.032,110.685) -201.032,113.685 ; -204,-5.896 ccw(c-201,-5.896) -201,-8.896 139.299,-8.896 ; -201.032,113.671 139.295,113.671 cw(c139.295,110.671) 142.295,110.671 142.295,-5.915 ; 139.299,-8.915 ccw(c139.299,-5.915) 142.299,-5.915
Mechanical 13:
  lines w0.254: -204.032,-5.896 -204.032,110.685 cw(c-201.032,110.685) -201.032,113.685 ; -204,-5.896 ccw(c-201,-5.896) -201,-8.896 139.299,-8.896 ; -201.032,113.671 139.295,113.671 cw(c139.295,110.671) 142.295,110.671 142.295,-5.915 ; 139.299,-8.915 ccw(c139.299,-5.915) 142.299,-5.915
Mechanical 16:
  lines w0.254: 31.882,97.465 37.089,97.465 ; 37.089,97.465 ccw(c37.089,100.531) 39.258,98.363 41.28,100.386 43.176,102.282 cw(c45.344,100.114) 45.344,103.18 53.472,103.18 cw(c53.472,100.114) 55.641,102.282 66.798,91.124 cw(c64.63,88.956) 67.696,88.956 67.696,84.638 cw(c64.63,84.638) 66.798,82.47 cw(c65.594,83.675) 65.594,81.971 61.219,81.971 cw(c61.219,85.037) 59.051,82.869 58.181,83.74 ccw(c56.012,81.572) 56.012,84.638 41.28,84.638 cw(c41.28,87.704) 39.112,85.536 37.734,86.915 ccw(c35.565,84.747) 35.565,87.813 26.124,87.813 ccw(c26.124,86.079) 24.897,87.305 24.473,86.88 cw(c22.738,88.615) 22.738,86.162 21.087,86.162 cw(c21.087,87.432) 19.817,87.432 19.817,96.195 cw(c21.087,96.195) 21.087,97.465 23.627,97.465 37.089,97.465

## Dimensions
142.295,110.671 to -204.032,110.685 on bot dimensions
139.299,-8.896 to 139.295,113.671 on bot dimensions
139.295,113.671 to 139.299,-8.896 on top dimensions
-204.032,110.685 to 142.295,110.671 on top dimensions